# EAGLE board Stepper Driver v2 (EAGLE 5.00)
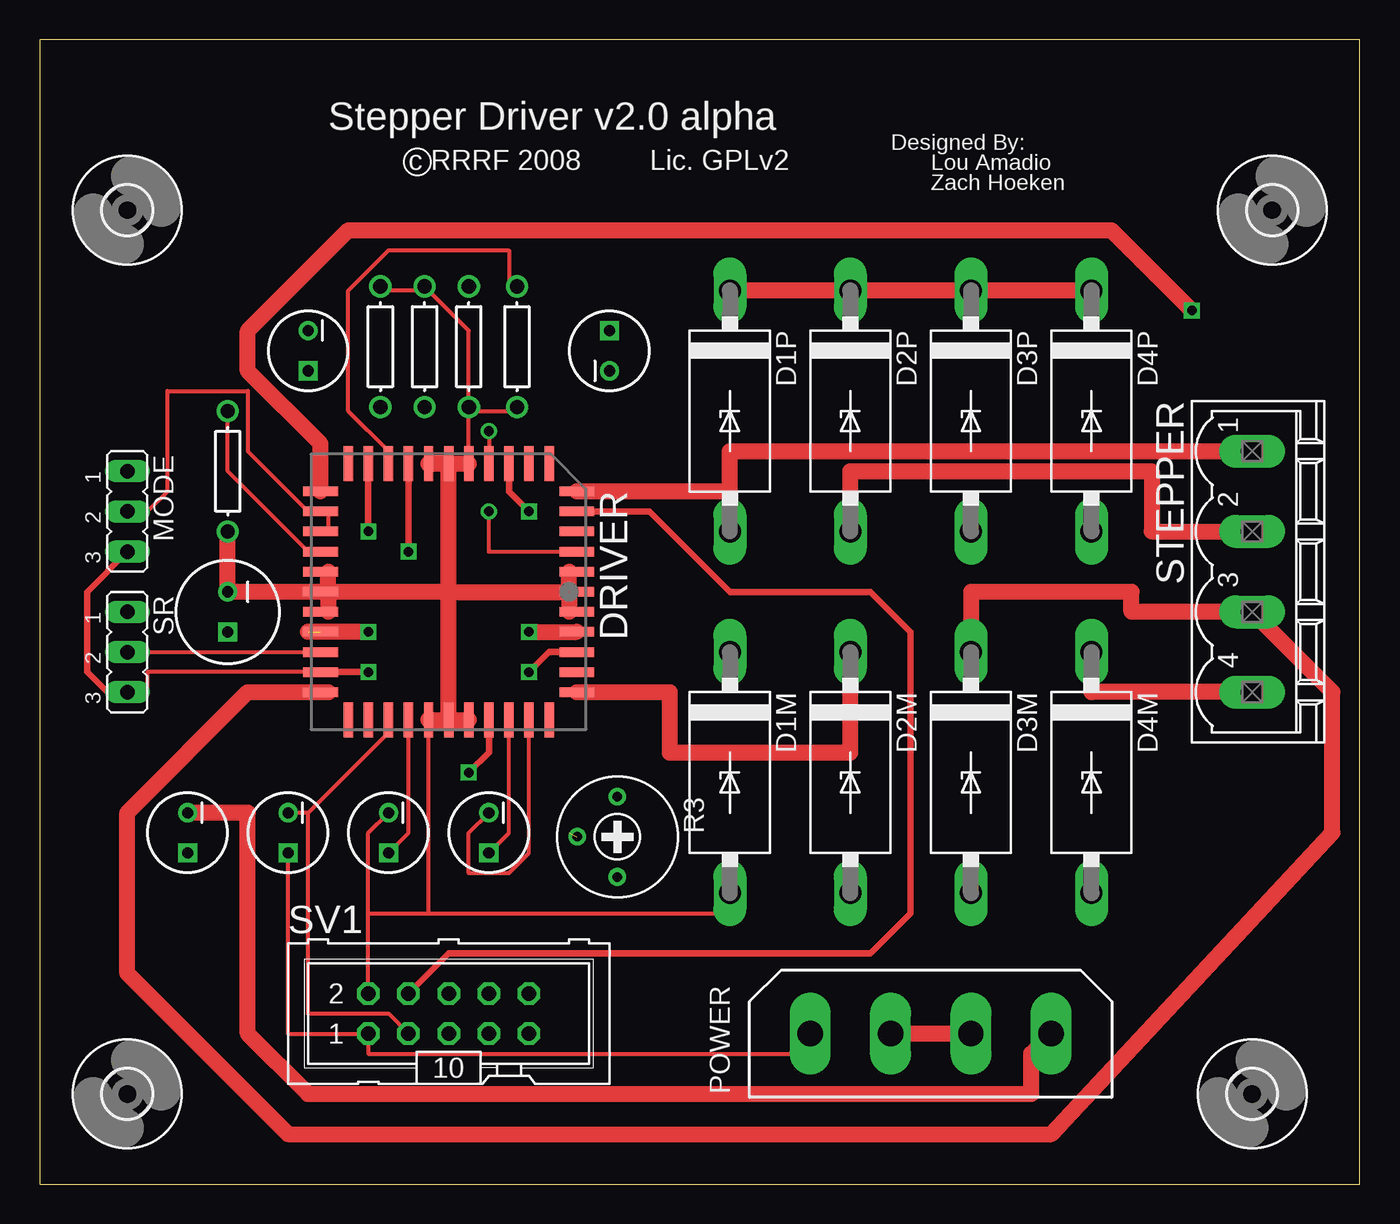
[diagram p0: board, top side]
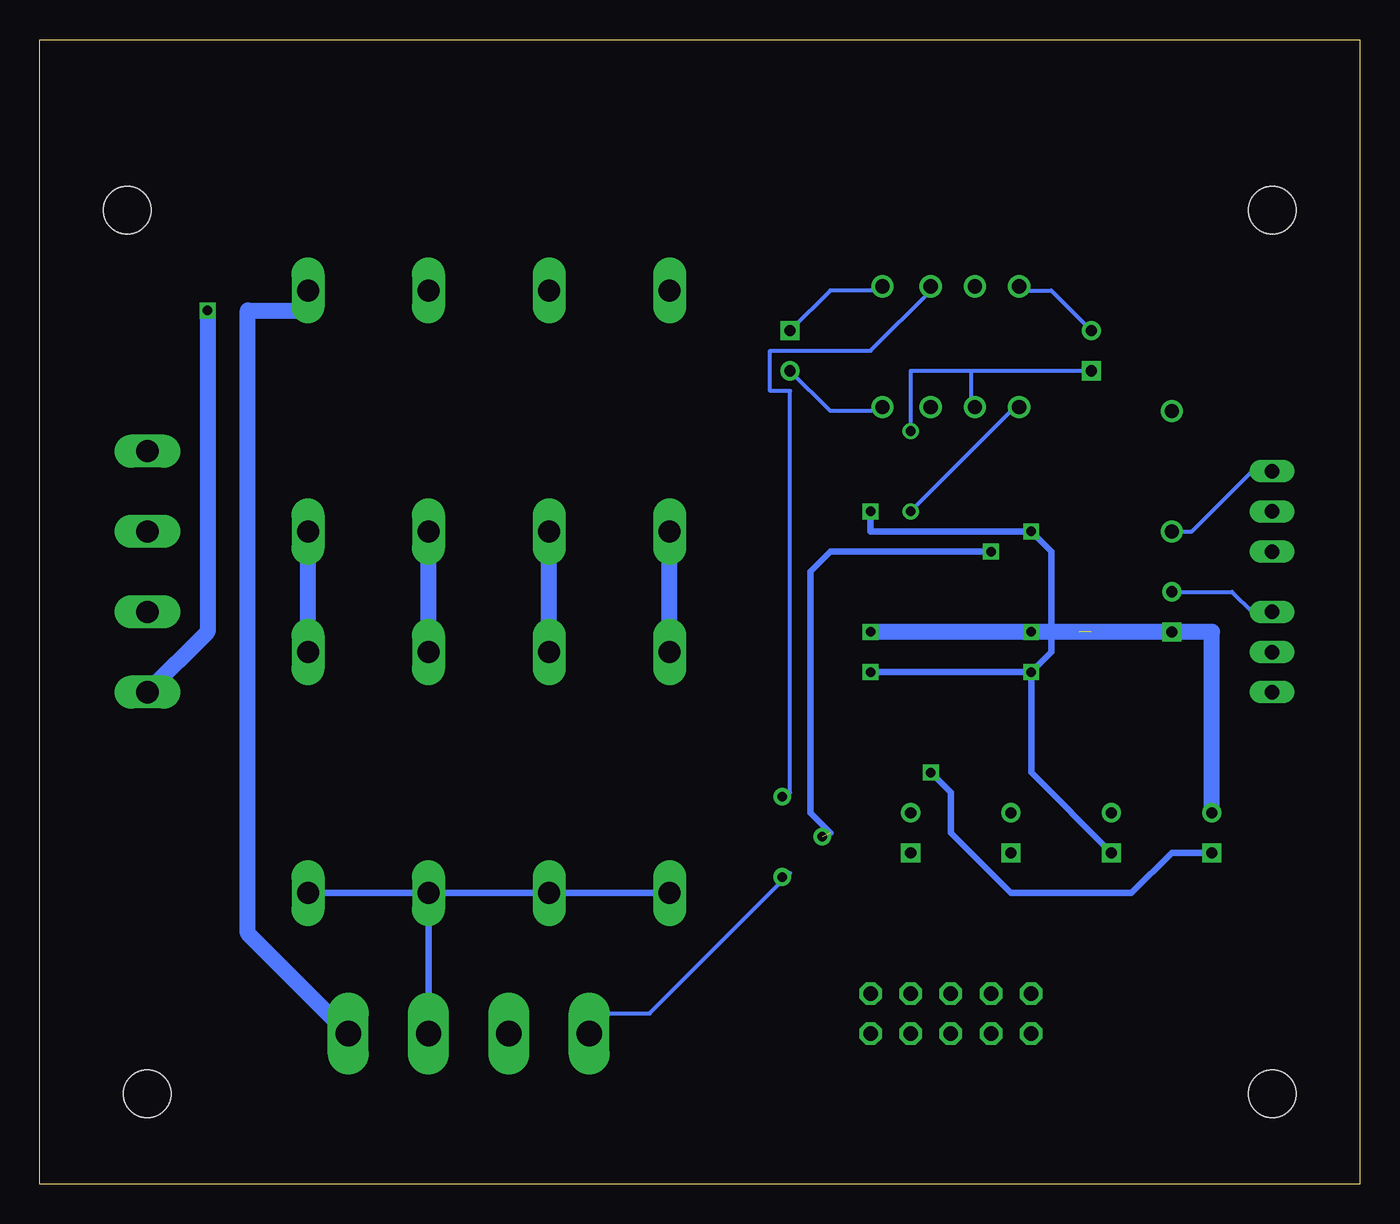
[diagram p1: board, bottom side, seen from below]

Size 83.49 x 72.38 mm. Coordinates in mm from the lower left corner, seen from the top.
Outline: 0,0 83.49,0 83.49,72.38 0,72.38 0,0
Copper layers (1*16): Top 0.035mm / dielectric 1.5mm / Bottom 0.035mm
Design rules "default": minimum track width 10mil, minimum drill 24mil, track to track 8mil, track to pad 8mil, pad to pad 8mil, via to via 8mil, smd to smd 8mil, copper to edge 40mil, drill to drill 8mil, minimum pad ring 10mil, minimum via ring 8mil, stop-mask expansion 4mil, vias tented up to drill 0mil, thermal gap 10mil
Net classes: 1 Power: width 1.016 mm, clearance 0.508 mm

## Footprints (pad centres in the part's own frame; a part is rotated, then mirrored left to right if it is on the bottom)
CPOL-RADIAL-10UF-25V = drill 0.7 square: 1 1.27,0 | drill 0.7 round: 2 -1.27,0
CPOL-RADIAL-100UF-25V = drill 0.7 square: 1 1.27,0 | drill 0.7 round: 2 -1.27,0
CB429-15 = drill 1.397 long: A 7.62,0; C -7.62,0
PLCC44 = smd 0.6 x 2.2: 1 0,8.1; 2 -1.27,8.1; 3 -2.54,8.1; 4 -3.81,8.1; 5 -5.08,8.1; 6 -6.35,8.1; 18 -6.35,-8.1; 19 -5.08,-8.1; 20 -3.81,-8.1; 21 -2.54,-8.1; 22 -1.27,-8.1; 23 0,-8.1; 24 1.27,-8.1; 25 2.54,-8.1; 26 3.81,-8.1; 27 5.08,-8.1; 28 6.35,-8.1; 40 6.35,8.1; 41 5.08,8.1; 42 3.81,8.1; 43 2.54,8.1; 44 1.27,8.1 | smd 2.2 x 0.6: 7 -8.1,6.35; 8 -8.1,5.08; 9 -8.1,3.81; 10 -8.1,2.54; 11 -8.1,1.27; 12 -8.1,0; 13 -8.1,-1.27; 14 -8.1,-2.54; 15 -8.1,-3.81; 16 -8.1,-5.08; 17 -8.1,-6.35; 29 8.1,-6.35; 30 8.1,-5.08; 31 8.1,-3.81; 32 8.1,-2.54; 33 8.1,-1.27; 34 8.1,0; 35 8.1,1.27; 36 8.1,2.54; 37 8.1,3.81; 38 8.1,5.08; 39 8.1,6.35
JP2 = drill 0.914 long: 1 -2.54,0; 2 0,0; 3 2.54,0
9090-4V = drill 1.6 pad 2.6 long: 1 -7.62,0; 2 -2.54,0; 3 2.54,0; 4 7.62,0
AXIAL-0.3 = drill 0.9 round: P$1 -3.81,0; P$2 3.81,0
RTRIM3339P = drill 0.61 round: 1 -2.54,0; 2 0,-2.54; 3 2.54,0
MSTBV4 = drill 1.397 long: 1 -7.62,0; 2 -2.54,0; 3 2.54,0; 4 7.62,0
ML10 = drill 0.914 octagon: 1 -5.08,-1.27; 2 -5.08,1.27; 3 -2.54,-1.27; 4 -2.54,1.27; 5 0,-1.27; 6 0,1.27; 7 2.54,-1.27; 8 2.54,1.27; 9 5.08,-1.27; 10 5.08,1.27
3,0 = hole 3: 0,0

## Placement (x,y rotation side)
C1  .22uF  [CPOL-RADIAL-10UF-25V]  28.41,22.22 270 top
C2  .33uF  [CPOL-RADIAL-10UF-25V]  15.71,22.22 270 top
C3  .22uF  [CPOL-RADIAL-10UF-25V]  9.36,22.22 270 top
C4  47uF  [CPOL-RADIAL-100UF-25V]  11.9,36.19 270 top
C5  680pF  [CPOL-RADIAL-10UF-25V]  16.98,52.7 270 top
C6  680pF  [CPOL-RADIAL-10UF-25V]  36.03,52.7 90 top
C7  .33uF  [CPOL-RADIAL-10UF-25V]  22.06,22.22 270 top
D1M  [CB429-15]  43.65,26.03 270 top
D1P  [CB429-15]  43.65,48.89 270 top
D2M  [CB429-15]  51.27,26.03 270 top
D2P  [CB429-15]  51.27,48.89 270 top
D3M  [CB429-15]  58.89,26.03 270 top
D3P  [CB429-15]  58.89,48.89 270 top
D4M  [CB429-15]  66.51,26.03 270 top
D4P  [CB429-15]  66.51,48.89 270 top
DRIVER  A3977  [PLCC44]  25.87,37.46 270 top
MODE  [JP2]  5.55,42.54 270 top
POWER  9090-4V  [9090-4V]  56.35,9.52 0 top
R1  20k  [AXIAL-0.3]  24.35,52.95 270 top
R2  20k  [AXIAL-0.3]  30.19,52.95 90 top
R3  10k  [RTRIM3339P]  36.54,21.97 270 top
RREF  2.61k  [AXIAL-0.3]  27.14,52.95 90 top
RS1  .75  [AXIAL-0.3]  21.55,52.95 90 top
RS2  .75  [AXIAL-0.3]  11.9,45.08 270 top
SR  [JP2]  5.55,33.65 270 top
STEPPER  MST4V  [MSTBV4]  76.67,38.73 270 top
SV1  [ML10]  25.87,10.79 0 top
U$1  [3,0]  5.55,61.59 0 top
U$2  [3,0]  77.94,61.59 0 top
U$3  [3,0]  5.55,5.71 0 top
U$4  [3,0]  76.67,5.71 0 top

## Library data of the parts
C1-C7 R1 R2 RREF RS1 RS2 = SparkFunEagle-6-6-07
D1M D1P D2M D2P D3M D3P D4M D4P = diode
DRIVER = linear
MODE SR = jumper
POWER = con-thomas-betts
R3 = rcl
STEPPER = con-phoenix-508
SV1 = con-harting-ml
U$1-U$4 = holes

## Nets
DIR: DRIVER.5 SV1.4
ENABLE: DRIVER.41
GND: C4.2 C5.2 C6.2 C7.2 D1M.A D2M.A D3M.A D4M.A DRIVER.1 DRIVER.2 DRIVER.11 DRIVER.12 DRIVER.13 DRIVER.22 DRIVER.23 DRIVER.24 DRIVER.33 DRIVER.34 DRIVER.35 DRIVER.44 MODE.1 POWER.2 POWER.3 R1.P$1 R2.P$1 RREF.P$1 RS1.P$2 RS2.P$2 SR.1 SV1.2
N$1: C7.1 DRIVER.32
N$2: DRIVER.21 RS2.P$1
N$3: DRIVER.3 RS1.P$1
N$4 [Power]: C3.1 DRIVER.36
N$5: C1.1 DRIVER.37
N$6: C1.2 DRIVER.38
N$7: C5.1 DRIVER.10 R1.P$2
N$8: DRIVER.26 SR.2
N$9: R3.1 RREF.P$2
N$11: C6.1 DRIVER.15 R2.P$2
N$13: DRIVER.14 R3.2
N$14: DRIVER.19 DRIVER.20 MODE.2
N$16 [Power]: D1M.C D1P.A DRIVER.6 STEPPER.1
N$19 [Power]: D3M.C D3P.A DRIVER.28 STEPPER.3
N$25: D4M.C D4P.A DRIVER.18 STEPPER.4
N$28 [Power]: D2M.C D2P.A DRIVER.40 STEPPER.2
STEP: C2.2 DRIVER.31 SV1.3
VC+ [Power]: C3.2 C4.1 D1P.C D2P.C D3P.C D4P.C DRIVER.25 DRIVER.43 POWER.4
VCC: C2.1 DRIVER.9 DRIVER.16 DRIVER.27 DRIVER.42 MODE.3 POWER.1 R3.3 SR.3 SV1.1

## Tracks (layer width: path | path; a pad name or v marks a point on that pad's centre or on a via)
DIR
  Top 0.406: SV1.4 25.87,14.6 52.54,14.6 55.08,17.14 55.08,34.92 52.54,37.46 43.65,37.46 38.57,42.54 DRIVER.5 33.49,42.54
GND
  Top 0.254: 24.6,56.51 22.06,56.51 RS1.P$2 | 27.14,48.89 29.68,48.89 R2.P$1 | 24.6,56.51 27.14,53.97 RREF.P$1 27.14,48.89 | 24.6,56.51 R1.P$1 | DRIVER.11 27.14,48.89 | C7.2 20.79,22.22 20.79,17.14 | SV1.2 20.79,17.14 | 20.79,17.14 24.6,17.14 | 24.6,17.14 43.65,17.14 D1M.A | 24.6,17.14 DRIVER.33
  Top 0.406: 18.25,38.73 DRIVER.22 | 18.25,36.19 DRIVER.24 | 18.25,37.46 DRIVER.23 | 33.49,38.73 DRIVER.2 | 33.49,36.19 DRIVER.44 | DRIVER.33 DRIVER.34 | DRIVER.35 27.14,29.84 | 33.49,37.46 DRIVER.1 | DRIVER.11 27.14,45.08
  Top 1.016: 18.25,37.46 18.25,36.19 | 33.49,37.46 33.49,38.73 | 33.49,37.46 33.49,36.19 | DRIVER.34 DRIVER.35 | 18.25,37.46 18.25,38.73 | 25.87,37.46 18.25,37.46 | 25.87,37.46 33.49,37.46 | DRIVER.33 DRIVER.34 | DRIVER.11 DRIVER.13 DRIVER.12 25.87,37.46 | DRIVER.34 25.87,37.46 | RS2.P$2 C4.2 DRIVER.23 | POWER.3 POWER.2
  Bottom 0.254: C4.2 8.09,37.46 6.82,36.19 SR.1 | RS2.P$2 10.63,41.27 6.82,45.08 MODE.1 | C5.2 19.52,56.51 22.06,56.51 RS1.P$2 | C6.2 33.49,48.89 29.68,48.89 R2.P$1
  Bottom 0.406: D3M.A D4M.A | D3M.A D2M.A D1M.A | D3M.A POWER.3
N$1
  Top 0.254: C7.1 23.33,22.22 DRIVER.32
N$2
  Top 0.254: RS2.P$1 11.9,45.08 16.98,40 DRIVER.21
N$3  (via drill 0.61)
  Top 0.254: v28.41,42.54 28.41,40 DRIVER.3
  Bottom 0.254: v28.41,42.54 22.06,48.89 RS1.P$1
N$4  (via drill 0.6)
  Top 0.406: v27.14,26.03 28.41,27.3 DRIVER.36 28.41,29.84
  Bottom 0.406: C3.1 11.9,20.95 14.44,18.41 22.06,18.41 25.87,22.22 25.87,24.76 v27.14,26.03
N$5
  Top 0.254: C1.1 29.68,22.22 DRIVER.37
N$6
  Top 0.254: C1.2 27.14,22.22 27.14,19.68 29.68,19.68 30.95,20.95 DRIVER.38
N$7  (via drill 0.61)
  Top 0.254: v28.41,47.62 DRIVER.10
  Bottom 0.254: v28.41,47.62 28.41,51.43 24.6,51.43 | C5.1 24.6,51.43 | 24.6,51.43 24.6,48.89 R1.P$2
N$8
  Top 0.254: SR.2 DRIVER.26
N$9
  Bottom 0.254: R3.1 36.03,24.76 36.03,50.16 37.3,50.16 37.3,52.7 30.95,52.7 27.14,56.51 RREF.P$2
N$11
  Top 0.254: DRIVER.15 22.06,46.35 19.52,48.89 19.52,56.51 22.06,59.05 29.68,59.05 29.68,56.51 R2.P$2
  Bottom 0.254: C6.1 33.49,56.51 29.68,56.51 R2.P$2
N$13  (via drill 0.6)  (1 unrouted)
  Top 0.406: DRIVER.14 v23.33,40
  Bottom 0.406: v23.33,40 33.49,40 34.76,38.73 34.76,23.49 33.49,22.22
N$14
  Top 0.254: DRIVER.20 18.25,41.27 18.25,42.54 DRIVER.19 16.98,42.54 13.17,46.35 13.17,50.16 8.09,50.16 8.09,43.81 6.82,42.54 MODE.2
N$16
  Top 0.406: D1P.A 43.65,43.81
  Top 1.016: STEPPER.1 43.65,46.35 43.65,43.81 DRIVER.6
  Bottom 1.016: D1M.C D1P.A
N$19
  Top 0.406: 18.25,31.11 DRIVER.28
  Top 1.016: D3M.C 58.89,37.46 69.05,37.46 69.05,36.19 STEPPER.3 81.75,31.11 81.75,22.22 63.97,3.17 15.71,3.17 5.55,13.33 5.55,23.49 13.17,31.11 18.25,31.11
  Bottom 1.016: D3M.C D3P.A
N$25  (via drill 0.6)
  Top 1.016: STEPPER.4 66.51,31.11 D4M.C | DRIVER.18 17.77,46.83 13.17,51.43 13.17,53.97 19.52,60.32 67.78,60.32 v72.86,55.24
  Bottom 1.016: D4M.C D4P.A | v72.86,55.24 72.86,34.92 STEPPER.4
N$28
  Top 1.016: STEPPER.2 70.32,41.27 70.32,45.08 51.27,45.08 D2P.A | DRIVER.40 39.84,31.11 39.84,27.3 51.27,27.3 D2M.C
  Bottom 1.016: D2M.C D2P.A
STEP
  Top 0.254: 16.98,23.49 22.06,28.57 DRIVER.31 | 16.98,23.49 C2.2 | SV1.3 22.06,10.79 16.98,10.79 16.98,23.49
VC+  (via drill 0.6)  (1 unrouted)
  Top 1.016: D1P.C D2P.C D3P.C D4P.C | C3.2 13.17,23.49 13.17,9.52 16.98,5.71 62.7,5.71 62.7,8.25 POWER.4 | v20.79,34.92 16.98,34.92 | v30.95,34.92 DRIVER.43
  Bottom 1.016: C3.2 9.36,34.92 C4.1 v20.79,34.92 v30.95,34.92 | POWER.4 70.32,15.87 70.32,55.24 66.51,55.24 D4P.C
VCC  (via drill 0.6)
  Top 0.254: DRIVER.27 6.82,32.38 6.82,31.11 SR.3 | C2.1 15.71,9.52 SV1.1 20.79,8.25 47.46,8.25 POWER.1
  Top 0.406: MODE.3 3.01,37.46 3.01,32.38 4.28,31.11 SR.3 | v20.79,32.38 DRIVER.27 | v30.95,32.38 32.22,33.65 DRIVER.42 34.76,33.65 | v20.79,41.27 DRIVER.16 | DRIVER.9 29.68,43.81 v30.95,42.54
  Bottom 0.254: R3.3 36.03,19.68 44.92,10.79 47.46,10.79 POWER.1
  Bottom 0.406: v20.79,32.38 v30.95,32.38 | v20.79,32.38 19.52,33.65 19.52,40 v20.79,41.27 30.95,41.27 v30.95,42.54 | C2.1 20.79,26.03 v20.79,32.38

## Text on the board
tPlace: Stepper Driver v2.0 alpha | Designed By: | c RRRF 2008 | Lic. GPLv2 | Lou Amadio | Zach Hoeken